# Altium PCB PCB.PcbDoc
Units mm, origin at the board's own origin, x right, y up, seen from the top; angles counter-clockwise.
Board outline 113.3 x 61.2 mm, 2 copper layers (Top Layer, Bottom Layer); 28 components, 88 nets, 257 pads, 76 vias.
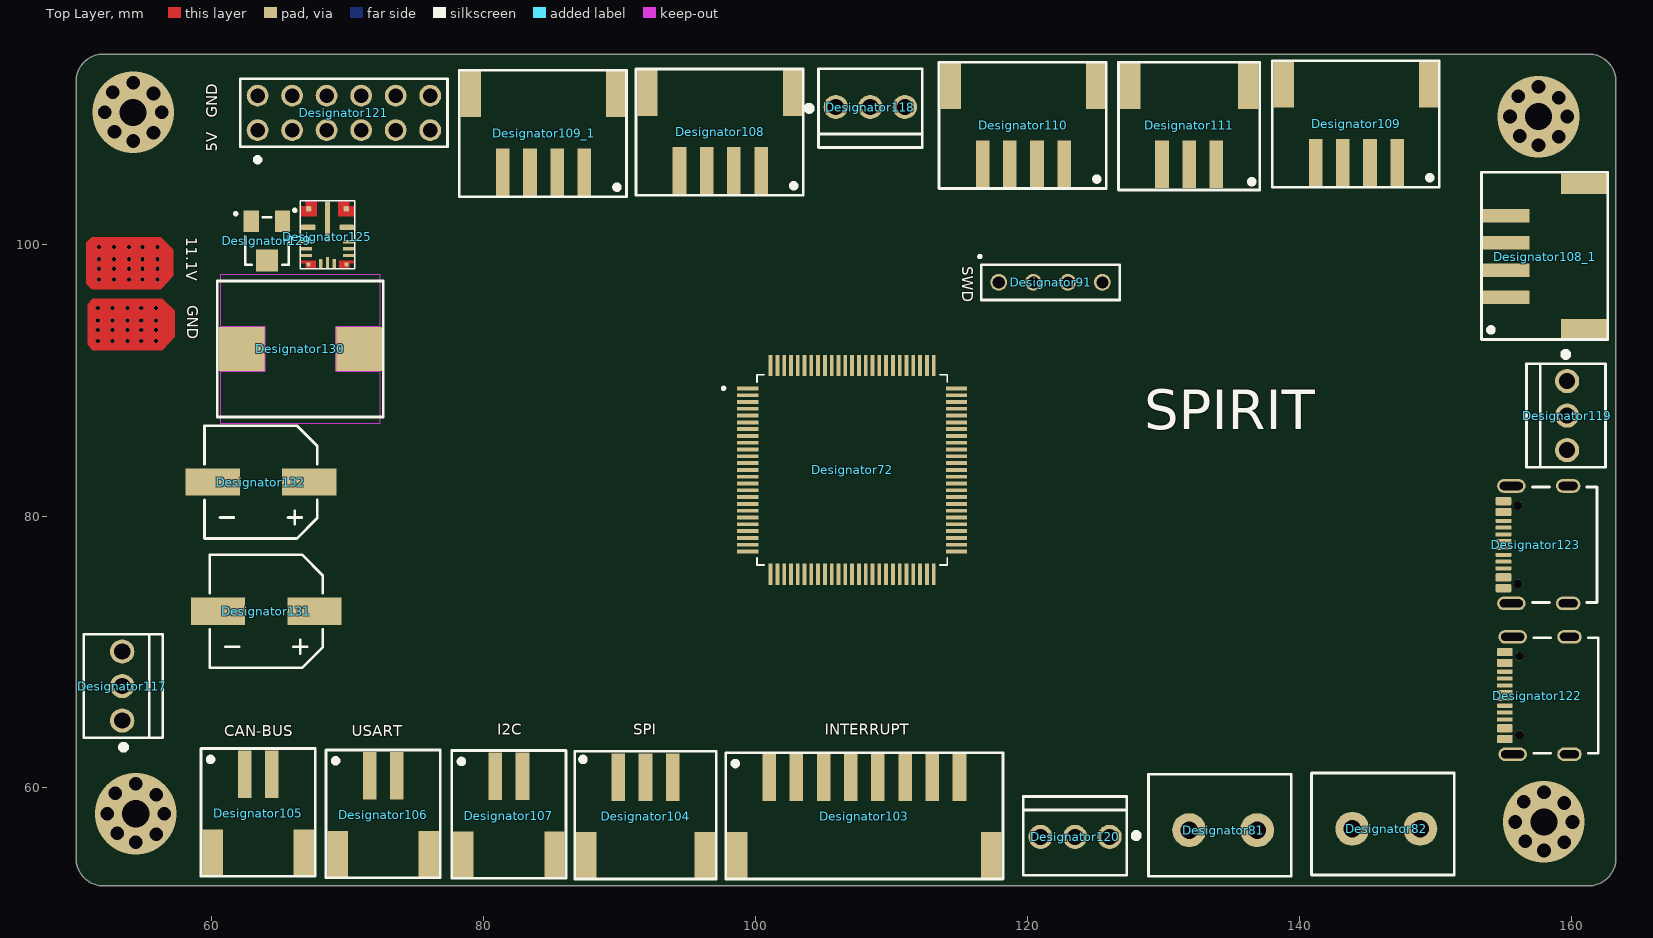
[diagram p0: Top Layer view]
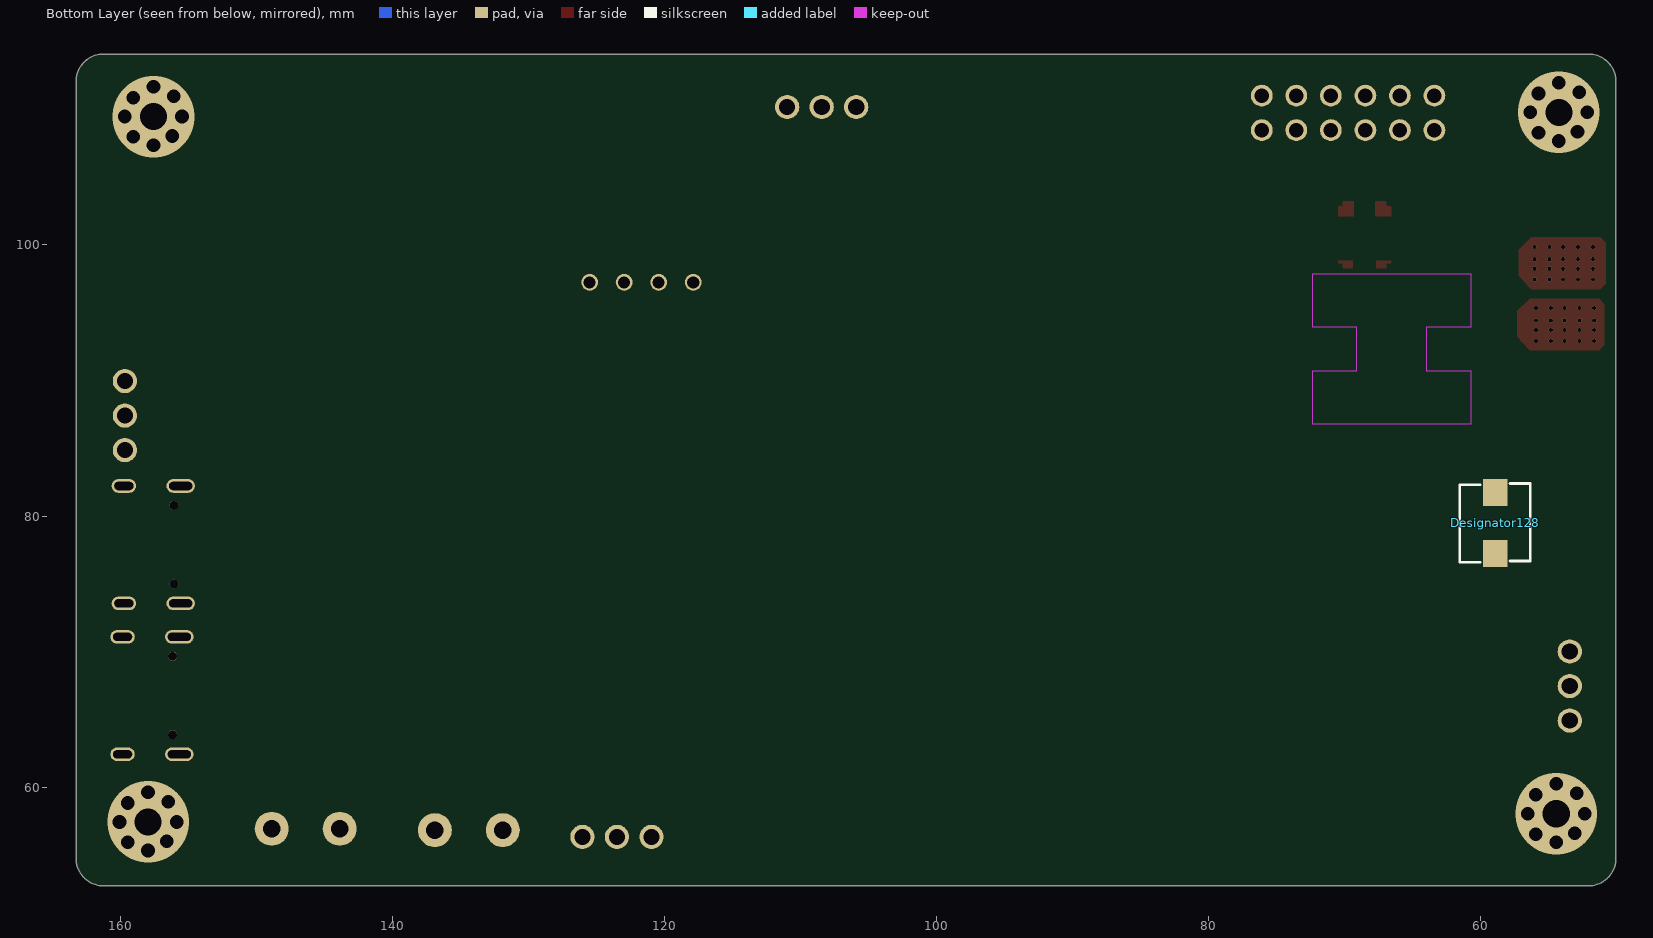
[diagram p1: Bottom Layer view, seen from below]

## Layer stack, top to bottom
Top Solder: solder mask 0.0102, Solder Resist, Dk 3.5
Top Layer: signal copper 0.0356
Dielectric 1: dielectric 0.32, FR-4, Dk 4.8
Bottom Layer: signal copper 0.0356
Bottom Solder: solder mask 0.0102, Solder Resist, Dk 3.5

## Board outline
51.9,52.8 cw(c52.05,54.85) 50,54.7 50,57.9 50,112.1 cw(c52.05,111.95) 51.9,114 54.9,114 108,114 150.6,114 161.4,114 cw(c161.25,111.95) 163.3,112.1 163.3,57.9 163.3,54.7 cw(c161.25,54.85) 161.4,52.8

## Design rules (kind name [scope] priority, off if disabled: settings)
Clearance [All] p1: gap=0.254 ignorepadtopadclearanceinfootprint=FALSE
PolygonConnect [All] p1: connectstyle=Relief reliefconductorwidth=0.254 reliefentries=4 polygonreliefangle="90 Angle" airgapwidth=0.254
RoutingVias [All] p1: holewidth=0.711 width=1.27 viastyle="Through Hole" minholewidth=0.711 minwidth=1.27 maxholewidth=0.711 maxwidth=1.27
SolderMaskExpansion [All] p1: expansion=0.102 istentingtop=FALSE
SupplyNets "Schematic Supply Nets_5" [InNet('VDDA')] p1: voltage=0.000
SupplyNets "Schematic Supply Nets_4" [InNet('GND')] p2: voltage=0.000
SupplyNets "Schematic Supply Nets_3" [InNet('11.1V')] p3: voltage=0.000
SupplyNets "Schematic Supply Nets_2" [InNet('VREF+')] p4: voltage=0.000
SupplyNets "Schematic Supply Nets_1" [InNet('VDD')] p5: voltage=0.000
SupplyNets "Schematic Supply Nets" [InNet('+3V3')] p6: voltage=0.000
Width [All] p1: maxlimit=2.54 minlimit=0.254 preferedwidth=0.254 toplayer_maxwidth=0.254 minimp=50.000000 maximp=50.000000 favimp=50.000000
30 further rules are at their usual default settings.

## Classes and differential pairs
component class Power: C1 R1
component class Peripherals: C23 C28 U3 U4 U6 U7 U8 U9 U10
component class Microcontroller: C4 C5 C6 C7 C9 C10 C17 C18 FB1 R11 S1 SW1 Y1 Y2
component class Connector: J2 J3 J4 J5 J6 J7 J8 J9 J10 J11 J12

## Components (designator, comment, footprint, x,y, rotation, side; value= is the part's Value field where it differs from the comment)
Designator72 "Comment" LQFP-100 107.1,83.4 r0 top
Designator81 "Comment" 691502710002 134.4,56.9 r0 top
Designator82 "Comment" 691502710002 146.4,57 r0 top
Designator91 "Comment" BCS-104-F-S-TE 121.7,97.2 r0 top
Designator103 "Comment" S8B-PH-SM4-TB 108,60.8 r180 top
Designator104 "Comment" S3B-PH-SM4-TB 91.9,60.8 r180 top
Designator105 "Comment" S2B-PH-SM4-TB 63.4,61 r180 top
Designator106 "Comment" S2B-PH-SM4-TB 72.6,60.9 r180 top
Designator107 "Comment" S2B-PH-SM4-TB 81.85,60.85 r180 top
Designator108 "Comment" S4B-PH-SM4-TB 97.4,105.4 r0 top
Designator108_1 "Comment" S4B-PH-SM4-TB 155.2,99.1 r270 top
Designator109 "Comment" S4B-PH-SM4-TB 144.2,106 r0 top
Designator109_1 "Comment" S4B-PH-SM4-TB 84.4,105.3 r0 top
Designator110 "Comment" S4B-PH-SM4-TB 119.7,105.9 r0 top
Designator111 "Comment" S3B-PH-SM4-TB 131.9,105.9 r0 top
Designator117 "Comment" 0022272031 53.4,67.5 r270 top
Designator118 "Comment" 0022272031 108.44,110.1 r180 top
Designator119 "Comment" 0022272031 159.7,87.4 r90 top
Designator120 "Comment" 0022272031 123.5,56.4 r0 top
Designator121 "Comment" G800W590018EU 69.71,109.67 r0 top
Designator122 "Comment" USB4105-GF-A-060 157.5,66.8 r90 top
Designator123 "Comment" USB4105-GF-A-060 157.4,77.9 r90 top
Designator125 "Comment" VQFN16 68.5,100.7 r0 top
Designator128 "Comment" 74437336010 58.9,79.5 r90 bottom
Designator129 "Comment" 3313J-1-104E 64.05,100.25 r180 top
Designator130 "Comment" ETQ-P4M2R2KVC 66.5,92.3 r0 top
Designator131 "Comment" EEE-FT1H221AL 64,73 r180 top
Designator132 "Comment" EEE-FT1H221AL 63.6,82.5 r180 top

## Footprints (in the part's own frame and the unit in brackets; to place one, negate y for a bottom-side part, rotate by r counter-clockwise, add the part's x,y. Pads: shape width x height; smd on the part's side, far side on the other; paste and mask are expansions set on the pad)
3313J-1-104E [mm]
  rect 1.12x1.6 smd mask+0.05: CCW(1.15,-1.45) CW(-1.15,-1.45)
  rect 1.6x1.6 smd mask+0.05: WIPER(0,1.45)
  silkscreen extent -1.6,-2.1 2.4,1.75, body extent -1.6,-1.75 1.6,1.75, height 2.4
0022272031 [mm]
  round 1.785 hole 1.19 mask+0.05: 1(2.54,0) 2(0,0) 3(-2.54,0)
  silkscreen extent -3.81,-2.82 4.7,2.98, body extent -3.81,-2.97 3.81,2.87, height 11.71
74437336010 [mm]
  rect 2x1.8 smd mask+0.05: 1(-2.25,0) 2(2.25,0)
  silkscreen extent -2.9,-2.6 2.9,2.6, body extent -2.85,-2.6 2.85,2.6, height 2.8
691502710002 [mm]
  round 2.5 hole 1.3 mask+0.05: 1(-2.5,0) 2(2.5,0)
  silkscreen extent -5.5,-3.4 5,4.1, body extent -5.5,-3.35 5,4.15, height 10.09
BCS-104-F-S-TE [mm]
  round 1.24 hole 0.89 mask+0.05: 1(-3.81,0) 2(-1.27,0) 3(1.27,0) 4(3.81,0)
  silkscreen extent -5.3,-1.3 5.1,2, body extent -5.08,-1.27 5.08,1.27, height 7.37
EEE-FT1H221AL [mm]
  rect 4x2 smd mask+0.05: 1(-3.55,0) 2(3.55,0)
  silkscreen extent -4.15,-4.15 4.15,4.15, body extent -4.85,-4.15 4.85,4.15, height 10.25
ETQ-P4M2R2KVC [mm]
  rect 3.439x3.254 smd mask+0.05: 1(-4.313,0) 2(4.313,0)
  Keep-Out Layer region: 5.85,1.627 2.594,1.627 2.594,-1.627 5.85,-1.627 5.85,-5.5 -5.85,-5.5 -5.85,-1.627 -2.594,-1.627 -2.594,1.627 -5.85,1.627 -5.85,5.5 5.85,5.5
  silkscreen extent -6.1,-5 6.1,5, body extent -5.4,-5 5.4,5, height 4
G800W590018EU [mm] "Connector Header Through Hole 12 position 0.100\" (2.54mm)"
  round 1.605 hole 1.07 mask+0.05: 1(-6.35,-1.27) 2(-6.35,1.27) 3(-3.81,-1.27) 4(-3.81,1.27) 5(-1.27,-1.27) 6(-1.27,1.27) 7(1.27,-1.27) 8(1.27,1.27) 9(3.81,-1.27) 10(3.81,1.27) 11(6.35,-1.27) 12(6.35,1.27)
  silkscreen extent -7.62,-3.55 7.62,2.5, body extent -7.62,-2.5 7.62,2.5, height 8.85
LQFP-100 [mm] "14x14mm"
  rect 1.56x0.28 smd: 1(-7.68,6) 2(-7.68,5.5) 3(-7.68,5) 4(-7.68,4.5) 5(-7.68,4) 6(-7.68,3.5) 7(-7.68,3) 8(-7.68,2.5) 9(-7.68,2) 10(-7.68,1.5) 11(-7.68,1) 12(-7.68,0.5) 13(-7.68,0) 14(-7.68,-0.5) 15(-7.68,-1) 16(-7.68,-1.5) 17(-7.68,-2) 18(-7.68,-2.5) 19(-7.68,-3) 20(-7.68,-3.5) 21(-7.68,-4) 22(-7.68,-4.5) 23(-7.68,-5) 24(-7.68,-5.5) 25(-7.68,-6) 51(7.68,-6) 52(7.68,-5.5) 53(7.68,-5) 54(7.68,-4.5) 55(7.68,-4) 56(7.68,-3.5) 57(7.68,-3) 58(7.68,-2.5) 59(7.68,-2) 60(7.68,-1.5) 61(7.68,-1) 62(7.68,-0.5) 63(7.68,0) 64(7.68,0.5) 65(7.68,1) 66(7.68,1.5) 67(7.68,2) 68(7.68,2.5) 69(7.68,3) 70(7.68,3.5) 71(7.68,4) 72(7.68,4.5) 73(7.68,5) 74(7.68,5.5) 75(7.68,6)
  rect 0.28x1.56 smd: 26(-6,-7.68) 27(-5.5,-7.68) 28(-5,-7.68) 29(-4.5,-7.68) 30(-4,-7.68) 31(-3.5,-7.68) 32(-3,-7.68) 33(-2.5,-7.68) 34(-2,-7.68) 35(-1.5,-7.68) 36(-1,-7.68) 37(-0.5,-7.68) 38(0,-7.68) 39(0.5,-7.68) 40(1,-7.68) 41(1.5,-7.68) 42(2,-7.68) 43(2.5,-7.68) 44(3,-7.68) 45(3.5,-7.68) 46(4,-7.68) 47(4.5,-7.68) 48(5,-7.68) 49(5.5,-7.68) 50(6,-7.68) 76(6,7.68) 77(5.5,7.68) 78(5,7.68) 79(4.5,7.68) 80(4,7.68) 81(3.5,7.68) 82(3,7.68) 83(2.5,7.68) 84(2,7.68) 85(1.5,7.68) 86(1,7.68) 87(0.5,7.68) 88(0,7.68) 89(-0.5,7.68) 90(-1,7.68) 91(-1.5,7.68) 92(-2,7.68) 93(-2.5,7.68) 94(-3,7.68) 95(-3.5,7.68) 96(-4,7.68) 97(-4.5,7.68) 98(-5,7.68) 99(-5.5,7.68) 100(-6,7.68)
  silkscreen extent -9.56,-7 7,7, body extent -8,-8 8,8, height 1.6
S2B-PH-SM4-TB [mm]
  rect 1x3.5 smd mask+0.05: 1(1,0) 2(-1,0)
  rect 1.5x3.4 smd mask+0.05: ""(-3.35,5.75) ""(3.35,5.75)
  silkscreen extent -4.2,-1.9 4.2,7.5, body extent -3.95,-1.5 3.95,7.1, height 5.6
S3B-PH-SM4-TB [mm]
  rect 1x3.5 smd mask+0.05: 1(2,0) 2(0,0) 3(-2,0)
  rect 1.5x3.4 smd mask+0.05: ""(-4.35,5.75) ""(4.35,5.75)
  silkscreen extent -5.2,-1.9 5.2,7.5, body extent -4.95,-1.4 4.95,7.2, height 5.6
S4B-PH-SM4-TB [mm]
  rect 1x3.5 smd mask+0.05: 1(3,0) 2(1,0) 3(-1,0) 4(-3,0)
  rect 1.5x3.4 smd mask+0.05: ""(-5.35,5.75) ""(5.35,5.75)
  silkscreen extent -6.2,-1.8 6.1,7.5, body extent -5.95,-1.5 5.95,7.1, height 5.6
S8B-PH-SM4-TB [mm]
  rect 1x3.5 smd mask+0.05: 1(7,0) 2(5,0) 3(3,0) 4(1,0) 5(-1,0) 6(-3,0) 7(-5,0) 8(-7,0)
  rect 1.5x3.4 smd mask+0.05: ""(-9.35,5.75) ""(9.35,5.75)
  silkscreen extent -10.2,-1.8 10.2,7.5, body extent -9.95,-1.4 9.95,7.2, height 5.6
USB4105-GF-A-060 [mm] "USB-C (USB TYPE-C) USB 2.0 Receptacle Connector 24 (16+8 Dummy) Position Surface Mount, Right Angle; Through Hole"
  rrect25% 0.6x1.15 smd mask+0.05: A1B12(-3.2,2.378) A4B9(-2.4,2.378) B1A12(3.2,2.378) B4A9(2.4,2.378)
  rrect25% 0.3x1.15 smd mask+0.05: A5(-1.25,2.378) A6(-0.25,2.378) A7(0.25,2.378) A8(1.25,2.378) B5(1.75,2.378) B6(0.75,2.378) B7(-0.75,2.378) B8(-1.75,2.378)
  round 0.65 hole 0.65 unplated mask+0.05: MH(-2.89,1.303) MH(2.89,1.303)
  oval 1x1.8 hole 0.6 slot 1.4 at 90 deg mask+0.05: SH(-4.32,-2.377) SH(4.32,-2.377)
  oval 1x2.1 hole 0.6 slot 1.7 at 90 deg mask+0.05: SH(-4.32,1.803) SH(4.32,1.803)
  silkscreen extent -4.25,-4.5 4.25,0.25, body extent -4.47,-4.97 4.47,2.73, height 3.27
VQFN16 [mm] "4.50 mm × 3.50 mm"
  rrect50% 0.4x0.4 smd paste-1 mask+0.102: 1(-1.375,1.9) 15(1.375,1.9)
  rrect50% 1.075x0.4 smd mask+0.05: 2(-1.413,0.55) 14(1.413,0.55)
  rrect50% 0.825x0.25 smd mask+0.05: 3(-1.538,-0.525) 4(-1.538,-1.025) 11(1.538,-1.525) 12(1.538,-1.025)
  rrect51% 0.825x0.25 smd mask+0.05: 5(-1.538,-1.525) 13(1.538,-0.525)
  rrect50% 0.3x0.3 smd paste-1 mask+0.102: 6(-1.4,-2.175) 10(1.4,-2.175)
  rrect50% 0.25x0.675 smd mask+0.05: 7(-0.5,-2.113) 9(0.5,-2.113)
  rrect50% 0.25x0.825 smd mask+0.05: 8(0,-2.038)
  rrect50% 0.35x2.975 smd mask+0.05: 16(0,0.963)
  Top Layer region: 175 vertices and 0 holes, not listed, extent 0.85,-2.45 1.95,-1.9
  Top Layer region: 175 vertices and 0 holes, not listed, extent 0.8,1.35 1.95,2.45
  Top Layer region: 175 vertices and 0 holes, not listed, extent -1.95,-2.45 -0.85,-1.9
  Top Layer region: 175 vertices and 0 holes, not listed, extent -1.95,1.35 -0.8,2.45
  silkscreen extent -2.5,-2.5 2,2.5, body extent -1.75,-2.25 1.75,2.25, height 1

## Via types
v1: diameter 0.3, hole 0.3, Top Layer to Bottom Layer, tented top, 40 vias
v2: diameter 1, hole 1, Top Layer to Bottom Layer, tented top, 32 vias
v3: diameter 6, hole 2, Top Layer to Bottom Layer, 4 vias

## Nets (pads, with @x,y where several pads share a name; then routed paths per layer and width w, separated by ;. In a path a pad name is that pad's centre, name@x,y a point inside that pad or via, vN(x,y) a via of type N, cw(c..) or ccw(c..) an arc to the next point about the centre after c; other vN are vias at no path point)
11.1V: 
+3V3: 
BOOT: 
GND: 
NetC9_2: 
NetC10_2: 
NetC28_1: 
NetJ2_1: 
NetJ2_2: 
NetJ3_1: 
NetJ3_2: 
NetJ4_2: 
NetJ4_3: 
NetJ5_1: 
NetJ5_2: 
NetJ6_2: 
NetJ6_3: 
NetJ7_2: 
NetJ7_3: 
NetJ8_1: 
NetJ8_2: 
NetJ8_3: 
NetJ9_1: 
NetJ9_2: 
NetJ11_2: 
NetJ11_3: 
NetJ12_2: 
NetJ12_3: 
NetR2_2: 
NetR3_1: 
NetR4_1: 
NetR5_1: 
NetR6_1: 
NetR7_1: 
NetR8_1: 
NetR12_1: 
NetR13_1: 
NetR14_1: 
NetR15_1: 
NetR16_1: 
NetR17_1: 
NetR18_1: 
NetR19_1: 
NetU1_1: 
NetU1_2: 
NetU1_3: 
NetU1_4: 
NetU1_5: 
NetU1_7: 
NetU1_15: 
NetU1_16: 
NetU1_17: 
NetU1_18: 
NetU1_22: 
NetU1_25: 
NetU1_29: 
NetU1_30: 
NetU1_31: 
NetU1_32: 
NetU1_33: 
NetU1_34: 
NetU1_45: 
NetU1_53: 
NetU1_54: 
NetU1_55: 
NetU1_56: 
NetU1_57: 
NetU1_58: 
NetU1_62: 
NetU1_68: 
NetU1_70: 
NetU1_71: 
NetU1_88: 
NetU1_89: 
NetU1_90: 
NetU1_91: 
NRST: 
OSC32_IN: 
OSC32_OUT: 
OSC_IN: 
OSC_OUT: 
UART8_RX: 
UART8_TX: 
USART2_RX: 
USART2_TX: 
VDD: 
VDDA: 
VREF+: 
pads on no net: Designator72.1 Designator72.2 Designator72.3 Designator72.4 Designator72.5 Designator72.6 Designator72.7 Designator72.8 Designator72.9 Designator72.10 Designator72.11 Designator72.12 Designator72.13 Designator72.14 Designator72.15 Designator72.16 Designator72.17 Designator72.18 Designator72.19 Designator72.20 Designator72.21 Designator72.22 Designator72.23 Designator72.24 Designator72.25 Designator72.26 Designator72.27 Designator72.28 Designator72.29 Designator72.30 Designator72.31 Designator72.32 Designator72.33 Designator72.34 Designator72.35 Designator72.36 Designator72.37 Designator72.38 Designator72.39 Designator72.40 Designator72.41 Designator72.42 Designator72.43 Designator72.44 Designator72.45 Designator72.46 Designator72.47 Designator72.48 Designator72.49 Designator72.50 Designator72.51 Designator72.52 Designator72.53 Designator72.54 Designator72.55 Designator72.56 Designator72.57 Designator72.58 Designator72.59 Designator72.60 Designator72.61 Designator72.62 Designator72.63 Designator72.64 Designator72.65 Designator72.66 Designator72.67 Designator72.68 Designator72.69 Designator72.70 Designator72.71 Designator72.72 Designator72.73 Designator72.74 Designator72.75 Designator72.76 Designator72.77 Designator72.78 Designator72.79 Designator72.80 Designator72.81 Designator72.82 Designator72.83 Designator72.84 Designator72.85 Designator72.86 Designator72.87 Designator72.88 Designator72.89 Designator72.90 Designator72.91 Designator72.92 Designator72.93 Designator72.94 Designator72.95 Designator72.96 Designator72.97 Designator72.98 Designator72.99 Designator72.100 Designator81.1 Designator81.2 Designator82.1 Designator82.2 Designator91.1 Designator91.2 Designator91.3 Designator91.4 Designator103. Designator103.1 Designator103.2 Designator103.3 Designator103.4 Designator103.5 Designator103.6 Designator103.7 Designator103.8 Designator104. Designator104.1 Designator104.2 Designator104.3 Designator105. Designator105.1 Designator105.2 Designator106. Designator106.1 Designator106.2 Designator107. Designator107.1 Designator107.2 Designator108. Designator108.1 Designator108.2 Designator108.3 Designator108.4 Designator108_1. Designator108_1.1 Designator108_1.2 Designator108_1.3 Designator108_1.4 Designator109. Designator109.1 Designator109.2 Designator109.3 Designator109.4 Designator109_1. Designator109_1.1 Designator109_1.2 Designator109_1.3 Designator109_1.4 Designator110. Designator110.1 Designator110.2 Designator110.3 Designator110.4 Designator111. Designator111.1 Designator111.2 Designator111.3 Designator117.1 Designator117.2 Designator117.3 Designator118.1 Designator118.2 Designator118.3 Designator119.1 Designator119.2 Designator119.3 Designator120.1 Designator120.2 Designator120.3 Designator121.1 Designator121.2 Designator121.3 Designator121.4 Designator121.5 Designator121.6 Designator121.7 Designator121.8 Designator121.9 Designator121.10 Designator121.11 Designator121.12 Designator122.A1B12 Designator122.A4B9 Designator122.A5 Designator122.A6 Designator122.A7 Designator122.A8 Designator122.B1A12 Designator122.B4A9 Designator122.B5 Designator122.B6 Designator122.B7 Designator122.B8 Designator122.MH Designator122.SH Designator123.A1B12 Designator123.A4B9 Designator123.A5 Designator123.A6 Designator123.A7 Designator123.A8 Designator123.B1A12 Designator123.B4A9 Designator123.B5 Designator123.B6 Designator123.B7 Designator123.B8 Designator123.MH Designator123.SH Designator125.1 Designator125.2 Designator125.3 Designator125.4 Designator125.5 Designator125.6 Designator125.7 Designator125.8 Designator125.9 Designator125.10 Designator125.11 Designator125.12 Designator125.13 Designator125.14 Designator125.15 Designator125.16 Designator128.1 Designator128.2 Designator129.CCW Designator129.CW Designator129.WIPER Designator130.1 Designator130.2 Designator131.1 Designator131.2 Designator132.1 Designator132.2
copper on no net: | length 33.6
  Top Layer w0.254: v2(52.1,109.7) v3(54.2,109.7) ; v2(52.3,58.1) v3(54.4,58.1) ; v2(52.7,111.2) v3(54.2,109.7) ; v2(52.831,108.268) v3(54.2,109.7) ; v2(52.9,59.6) v3(54.4,58.1) ; v2(53.031,56.668) v3(54.4,58.1) ; v2(54.2,111.9) v3(54.2,109.7) ; v2(54.4,60.3) v3(54.4,58.1) ; v2(155.5,109.4) v3(157.6,109.4) ; v2(155.9,57.5) v3(158,57.5) ; v2(156.1,110.9) v3(157.6,109.4) ; v2(156.231,107.968) v3(157.6,109.4) ; v2(156.5,59) v3(158,57.5) ; v2(156.631,56.068) v3(158,57.5) ; v2(157.6,111.6) v3(157.6,109.4) ; v2(158,59.7) v3(158,57.5)
  other v1: 51.6,92.9 52.7,92.9 53.8,92.9 54.8,92.9 55.9,92.9 51.6,93.7 52.7,93.7 53.8,93.7 54.8,93.7 55.9,93.7 51.6,94.4 52.7,94.4 53.8,94.4 54.8,94.4 55.9,94.4 51.6,95.3 52.7,95.3 53.8,95.3 54.8,95.3 55.9,95.3 51.7,97.4 52.8,97.4 53.9,97.4 54.9,97.4 56,97.4 51.7,98.2 52.8,98.2 53.9,98.2 54.9,98.2 56,98.2 51.7,98.9 52.8,98.9 53.9,98.9 54.9,98.9 56,98.9 51.7,99.8 52.8,99.8 53.9,99.8 54.9,99.8 56,99.8
  other v2: 158,55.4 54.4,56 159.5,56 55.9,56.6 160.1,57.5 56.5,58.1 159.503,58.895 55.903,59.495 157.6,107.3 54.2,107.6 159.1,107.9 55.7,108.2 159.7,109.4 56.3,109.7 159.103,110.795 55.703,111.095

## Other copper
Top Layer:
  region: 57.15,99.6 56.25,100.5 51.15,100.5 50.75,100.1 50.75,97.1 51.15,96.7 56.25,96.7 56.35,96.8 57.15,97.7
  region: 57.25,95.1 56.35,96 51.25,96 50.85,95.6 50.85,92.6 51.25,92.2 56.35,92.2 56.45,92.3 57.25,93.2

## Silkscreen, mask and mechanical layers (free items; w line width, h text height)
Top Overlay:
  text "GND" at 60.4,109.3 h0.8 r90
  text "5V" at 60.4,106.8 h0.8 r90
  text "11.1V" at 58.1,100.5 h0.8 r270
  text "SWD" at 115.2,98.4 h0.8 r270
  text "GND" at 58.2,95.5 h0.8 r270
  text "SPIRIT" at 128.586,85.432 h5
  text "I2C" at 81,63.9 h0.8
  text "SPI" at 91,63.9 h0.8
  text "INTERRUPT" at 105.1,63.9 h0.8
  text "CAN-BUS" at 60.9,63.8 h0.8
  text "USART" at 70.3,63.8 h0.8
Drill Guide:
  lines w0.762: 50,54.7 ccw(c52.05,54.85) 51.9,52.8 54.9,52.8 107.9,52.8 122.1,52.8 150.6,52.8 158.3,52.8 161.4,52.8 ccw(c161.25,54.85) 163.3,54.7 163.3,57.9 163.3,112.1 ccw(c161.25,111.95) 161.4,114 158.3,114 150.6,114 122.1,114 108,114 54.9,114 51.9,114 ccw(c52.05,111.95) 50,112.1 50,57.9 50,54.7